# Altium PCB OnePhaseSemLogica_V3.PcbDoc (part 1 of 2)
Units mm, origin at the board's own origin, x right, y up, seen from the top; angles counter-clockwise.
Board outline 104 x 162 mm, 2 copper layers (Top Layer, Bottom Layer); 211 components, 101 nets, 566 pads, 110 vias.
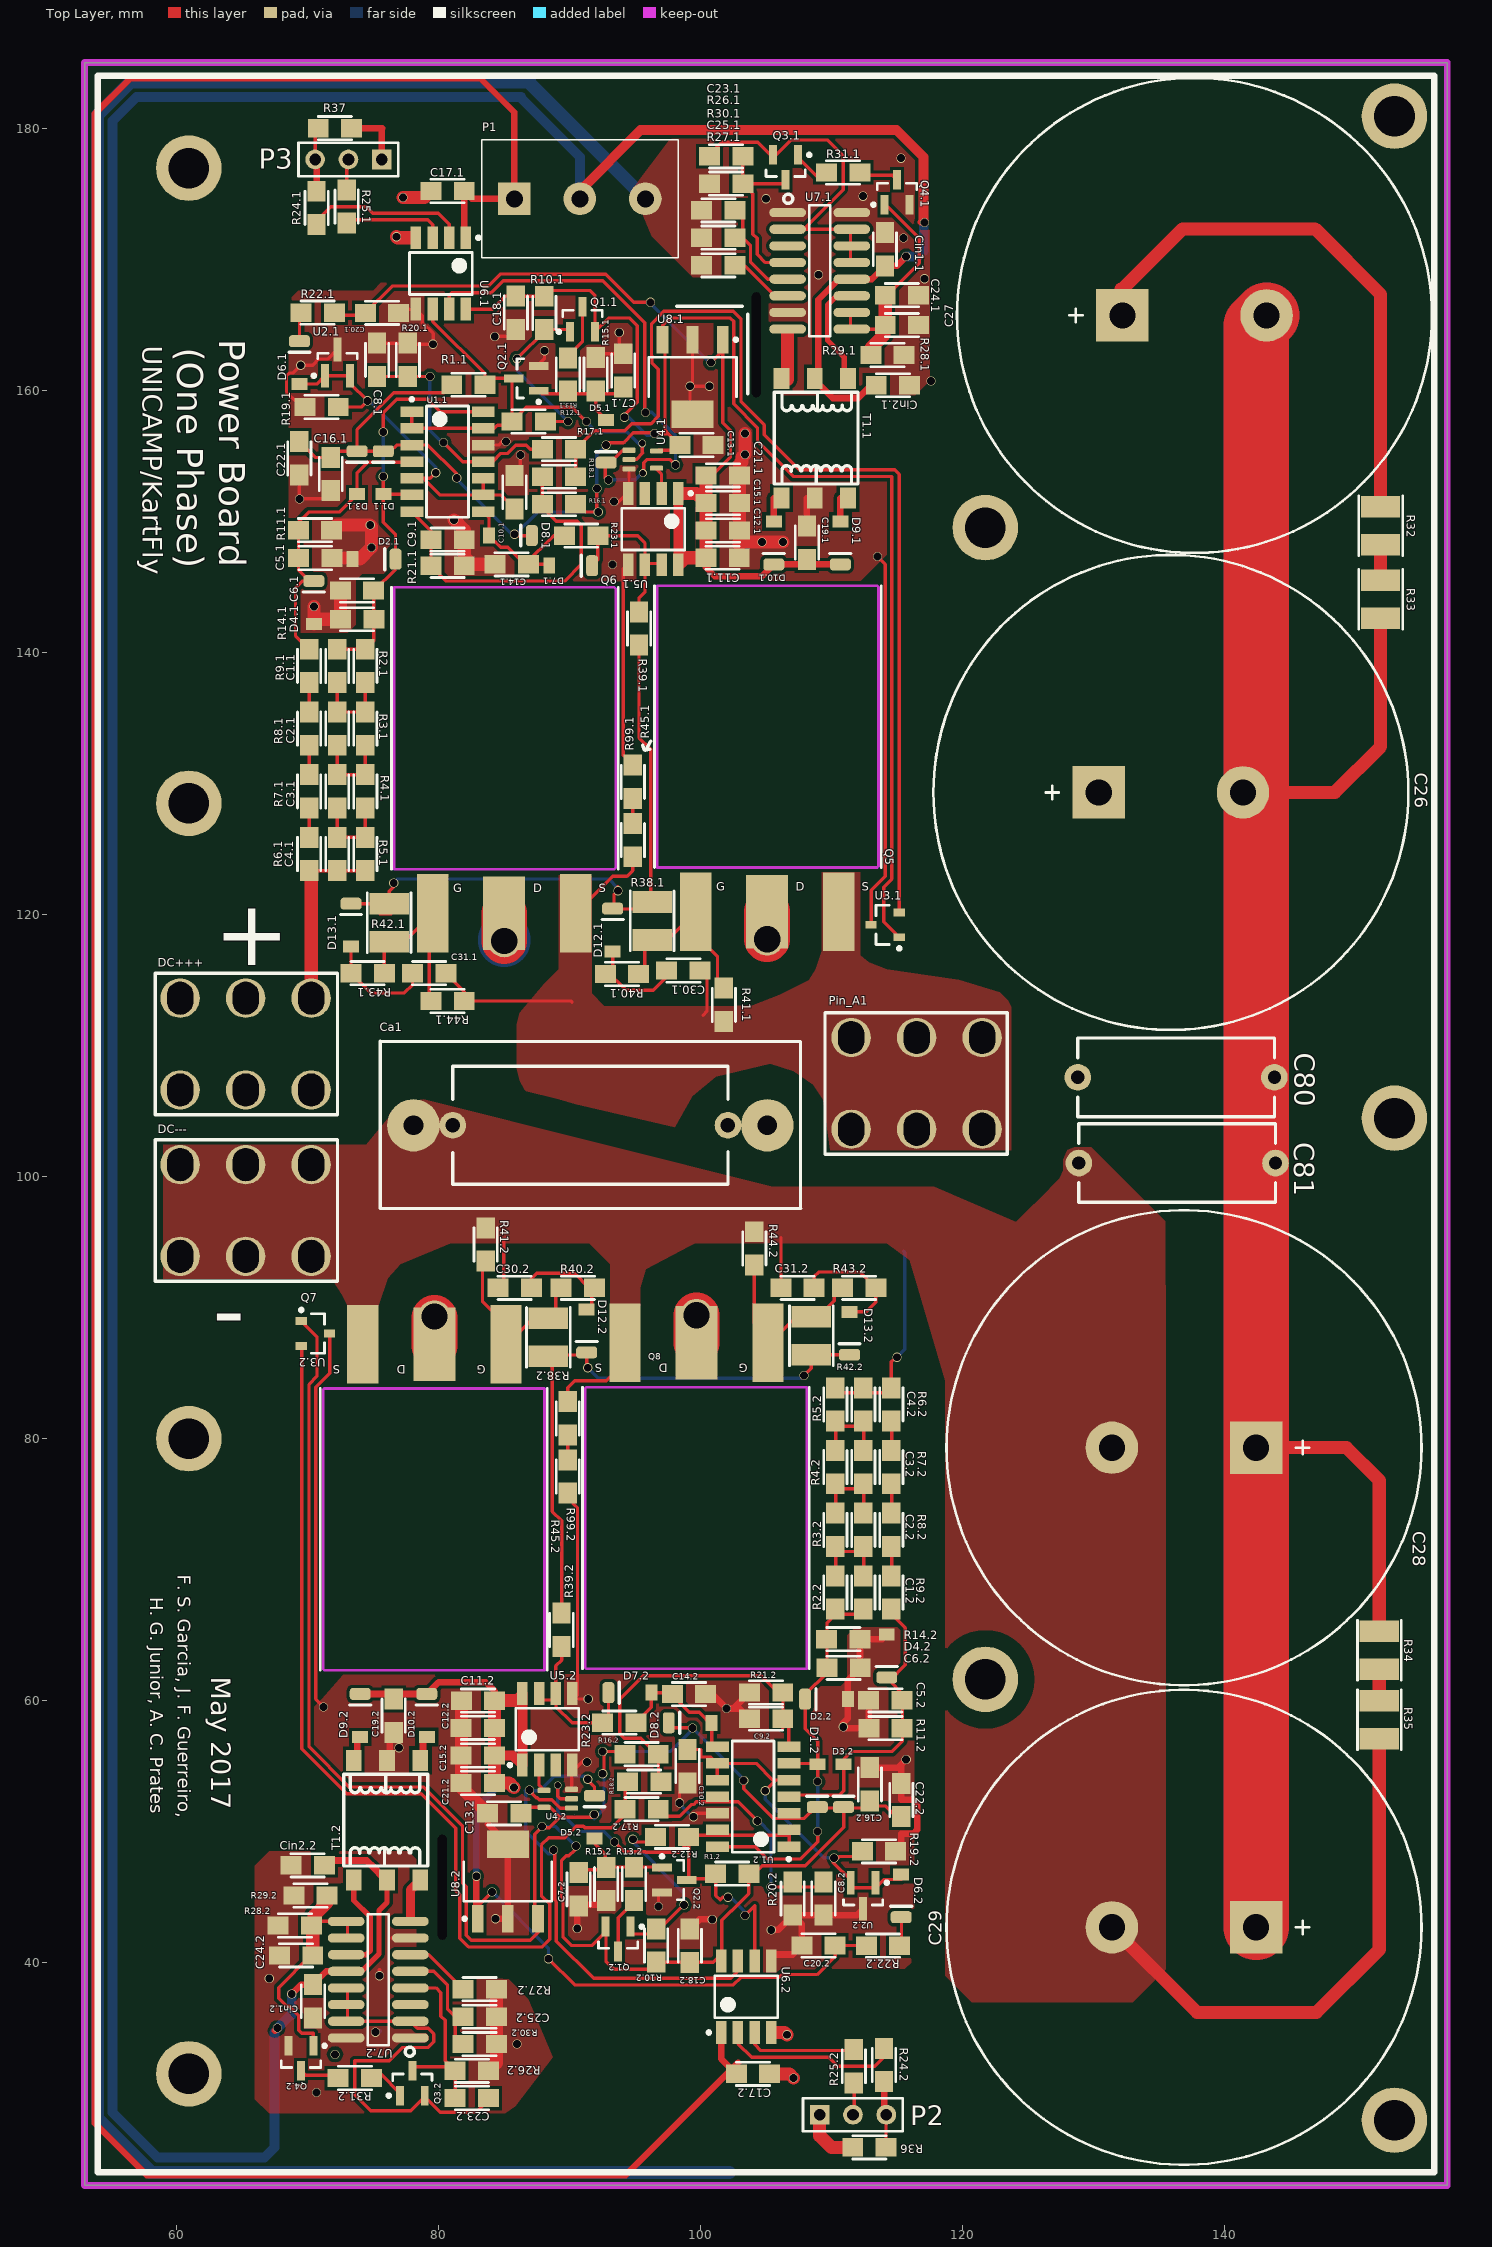
[diagram p0: Top Layer view]
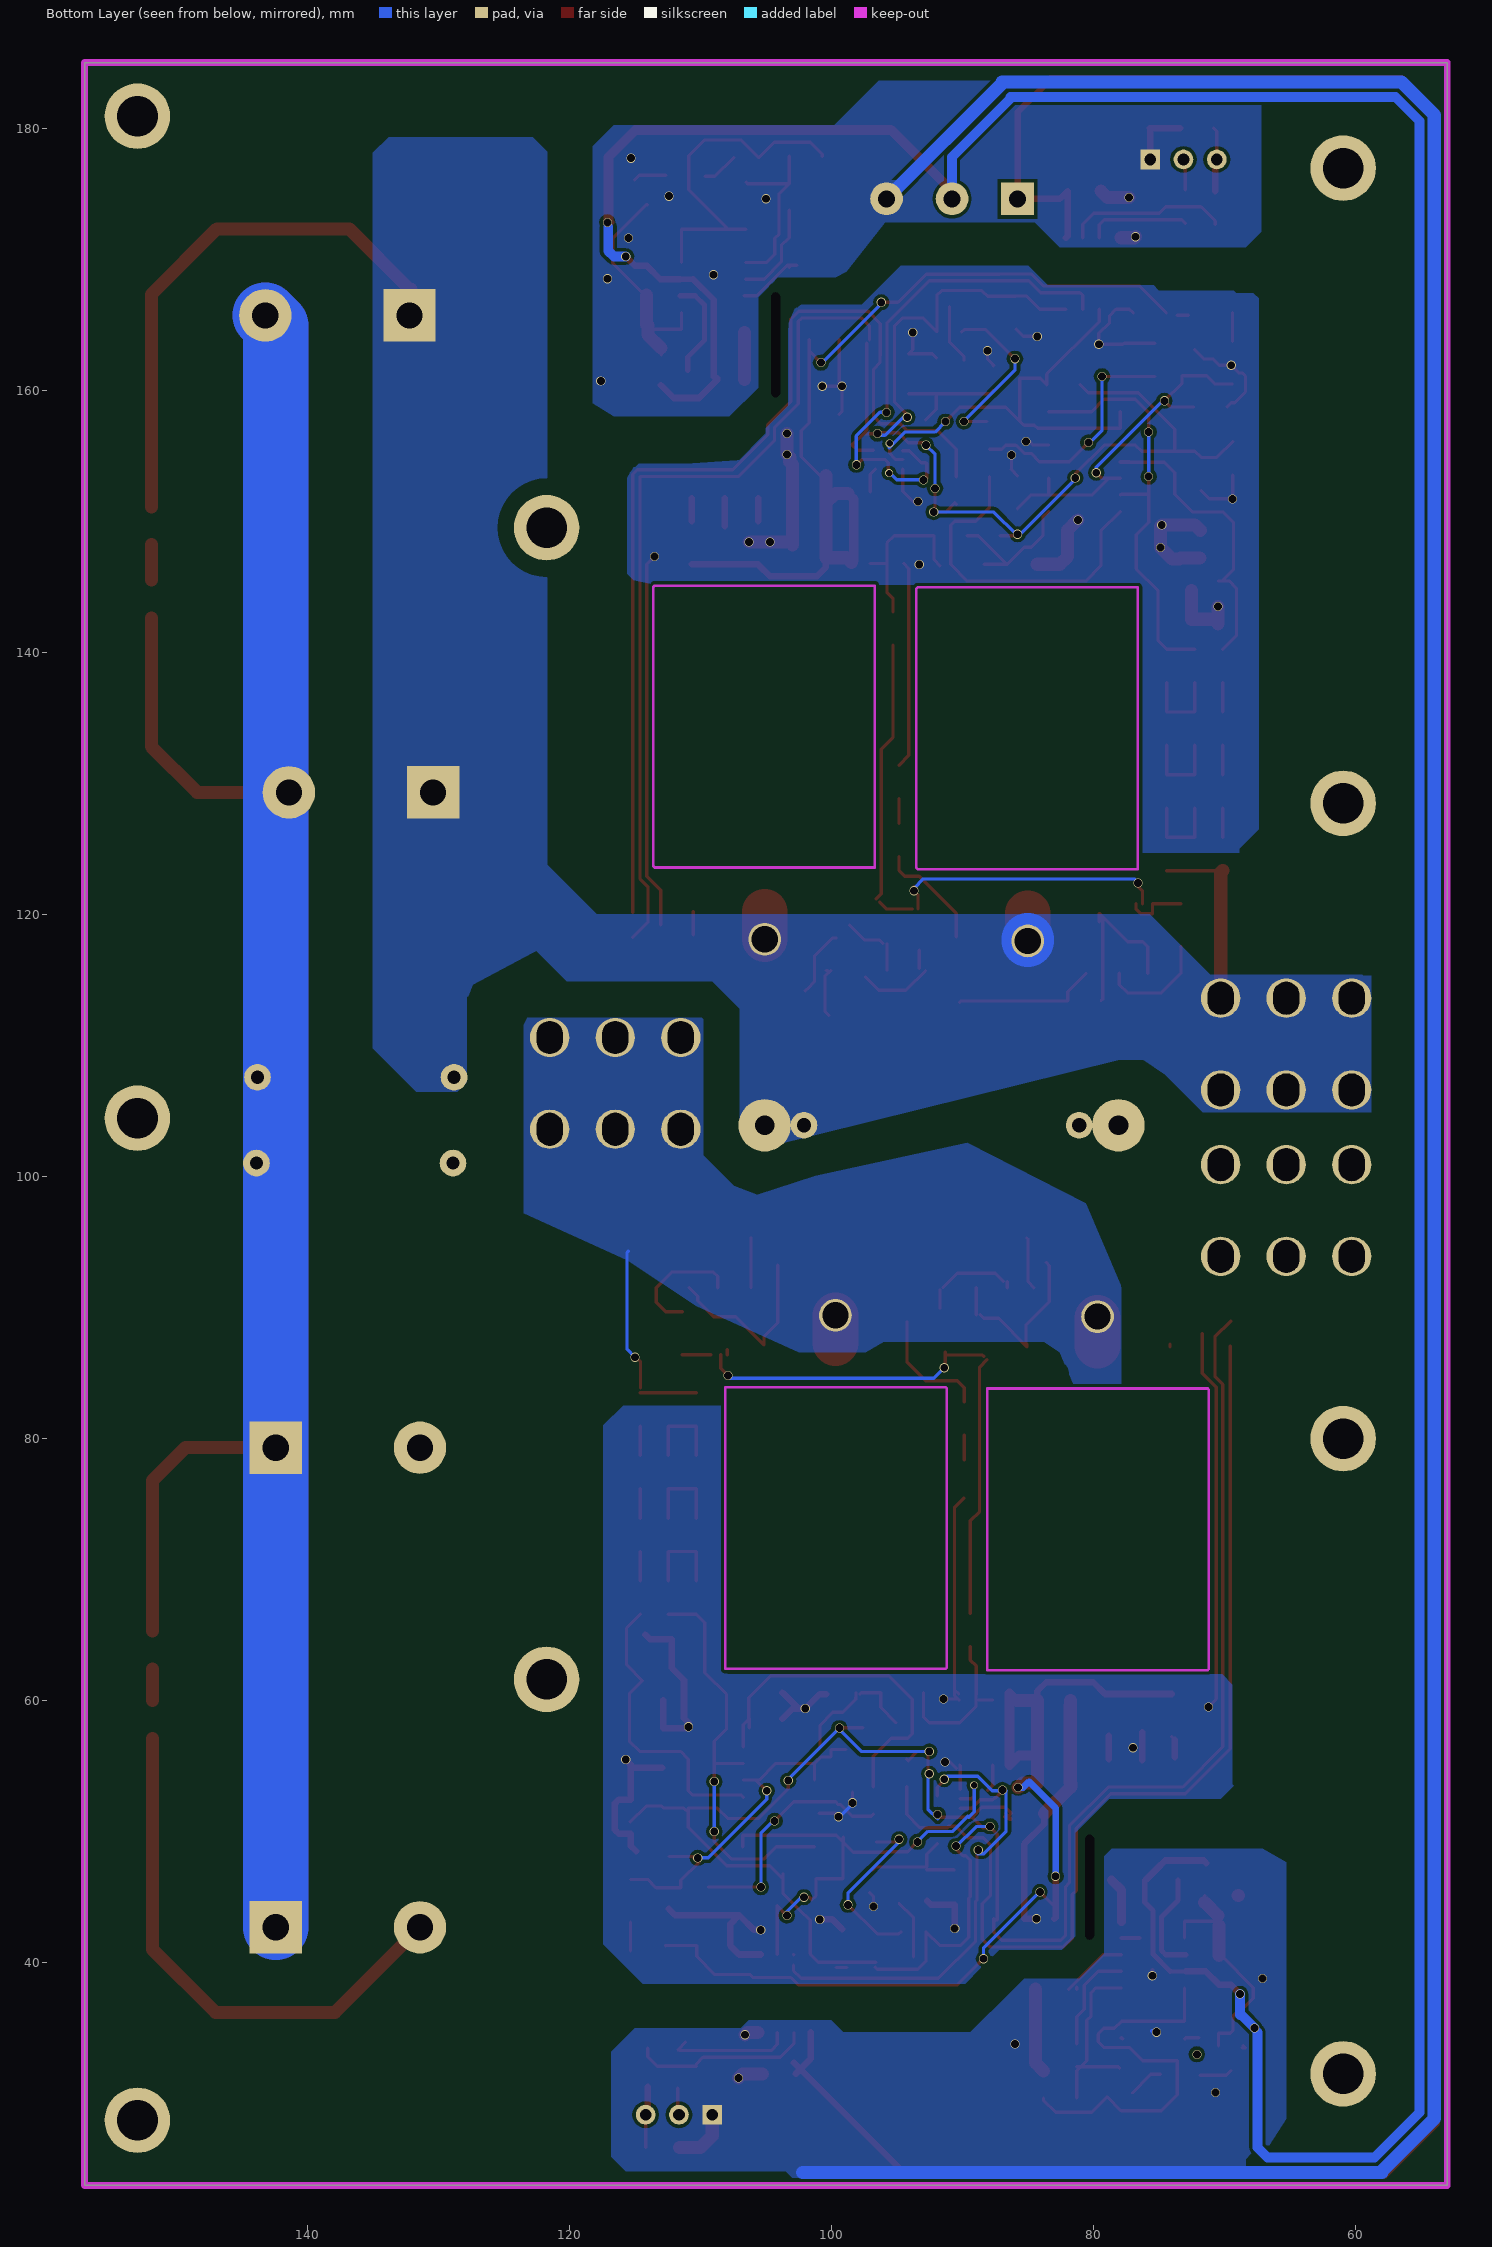
[diagram p1: Bottom Layer view, seen from below]

## Layer stack, top to bottom
Top Solder: solder mask 0.0102, Solder Resist, Dk 3.5
Top Layer: signal copper 0.0356
Dielectric 1: dielectric 0.32, FR-4, Dk 4.8
Bottom Layer: signal copper 0.0356
Bottom Solder: solder mask 0.0102, Solder Resist, Dk 3.5

## Board outline
53,23 157,23 157,185 53,185

## Design rules (kind name [scope] priority, off if disabled: settings)
Clearance [All] p1: gap=0.254
Height [All] p1: minheight=0 maxheight=45 prefheight=12.7
HoleSize [All] p1: absolutevalues=TRUE maxlimit=12 minlimit=0.025 maxpercent=80.000 minpercent=20.000
MinimumSolderMaskSliver [All] p1: minsoldermaskwidth=0.1
PlaneConnect [All] p1: planeconnectstyle=Direct reliefexpansion=0.508 reliefentries=4 reliefconductorwidth=0.254 reliefairgap=0.254
PolygonConnect [All] p1: connectstyle=Direct reliefconductorwidth=0.254 reliefentries=4 polygonreliefangle="90 Angle" airgapwidth=0.254
RoomDefinition U_GateCircuit2 [InComponentClass('U_GateCircuit2')] p1: confinementstyle=ConfineIn formatcopy=TRUE lockcomponents=FALSE outline 61.8,28.1 120.2,28.1 120.2,99.1 61.8,99.1
RoomDefinition U_GateCircuit1 [InComponentClass('U_GateCircuit1')] p2: confinementstyle=ConfineIn formatcopy=TRUE lockcomponents=FALSE outline 61.4,109.2 120,109.2 120,181.9 61.4,181.9
RoomDefinition MainPower [InComponentClass('MainPower')] p3: confinementstyle=ConfineIn formatcopy=TRUE lockcomponents=FALSE outline 52.7,23.5 157,23.5 157,184.3 52.7,184.3
RoomDefinition GD2 [InComponentClass('GD2')] p4: confinementstyle=ConfineIn formatcopy=TRUE lockcomponents=FALSE outline 61.7,26.3 118.5,26.3 118.5,96.4 61.7,96.4
RoomDefinition GD1 [InComponentClass('GD1')] p5: confinementstyle=ConfineIn formatcopy=TRUE lockcomponents=FALSE outline 61.4,110.8 119.1,110.8 119.1,181.8 61.4,181.8
RoomDefinition Supply_Iso1 [InComponentClass('Supply_Iso1')] p6: confinementstyle=ConfineIn formatcopy=TRUE lockcomponents=FALSE outline 61.4,112.2 119.6,112.2 119.6,181.9 61.4,181.9
RoomDefinition Supply_Iso2 [InComponentClass('Supply_Iso2')] p7: confinementstyle=ConfineIn formatcopy=TRUE lockcomponents=FALSE outline 61.8,26.4 118.8,26.4 118.8,96 61.8,96
RoomDefinition OnePhaseMain [InComponentClass('OnePhaseMain')] p8: confinementstyle=ConfineIn formatcopy=TRUE lockcomponents=FALSE outline 67.1,24.5 120.04,24.5 120.04,182.1 67.1,182.1
RoutingVias [All] p1: holewidth=0.7 width=1.1 viastyle="Through Hole" minholewidth=0.5 minwidth=0.6 maxholewidth=1 maxwidth=1.1
SilkToSilkClearance [All] p1: silktosilkclearance=0.01
SilkToSolderMaskClearance [IsPad] p1: minsilkscreentomaskgap=0.03 clearancetoexposedcopper=TRUE
SolderMaskExpansion [All] p1: expansion=0.102
Width [All] p1: maxlimit=50 minlimit=0.254 preferedwidth=0.254 minimp=50.000000 maximp=50.000000 favimp=50.000000
24 further rules are at their usual default settings.

## Classes and differential pairs
component class GD1: C1.1 C2.1 C3.1 C4.1 C5.1 C6.1 C7.1 C8.1 C9.1 C10.1 C11.1 C12.1 C13.1 C14.1 C15.1 C16.1 C17.1 C18.1 D1.1 D2.1 D3.1 D4.1 D5.1 D6.1 D7.1 D8.1 Q1.1 Q2.1 R1.1 R2.1 R3.1 R4.1 R5.1 R6.1 R7.1 R8.1 R9.1 R10.1 R11.1 R12.1 R13.1 R14.1 R15.1 R16.1 R17.1 R18.1 R19.1 R20.1 R21.1 R22.1 R23.1 R24.1 R25.1 U1.1 U2.1 U3.1 U4.1 U5.1 U6.1
component class GD2: C1.2 C2.2 C3.2 C4.2 C5.2 C6.2 C7.2 C8.2 C9.2 C10.2 C11.2 C12.2 C13.2 C14.2 C15.2 C16.2 C17.2 C18.2 D1.2 D2.2 D3.2 D4.2 D5.2 D6.2 D7.2 D8.2 Q1.2 Q2.2 R1.2 R2.2 R3.2 R4.2 R5.2 R6.2 R7.2 R8.2 R9.2 R10.2 R11.2 R12.2 R13.2 R14.2 R15.2 R16.2 R17.2 R18.2 R19.2 R20.2 R21.2 R22.2 R23.2 R24.2 R25.2 U1.2 U2.2 U3.2 U4.2 U5.2 U6.2
component class MainPower: C26 C27 C28 C29 C80 C81 Ca1 DC+++ DC--- Pin_A1 Q5 Q6 Q7 Q8 R32 R33 R34 R35
component class OnePhaseMain: P1 P2 P3 R36 R37
component class Supply_Iso1: C19.1 C20.1 C21.1 C22.1 C23.1 C24.1 C25.1 Cin1.1 Cin2.1 D9.1 D10.1 Q3.1 Q4.1 R26.1 R27.1 R28.1 R29.1 R30.1 R31.1 T1.1 U7.1 U8.1
component class Supply_Iso2: C19.2 C20.2 C21.2 C22.2 C23.2 C24.2 C25.2 Cin1.2 Cin2.2 D9.2 D10.2 Q3.2 Q4.2 R26.2 R27.2 R28.2 R29.2 R30.2 R31.2 T1.2 U7.2 U8.2
component class U_GateCircuit1: C30.1 C31.1 D12.1 D13.1 R38.1 R39.1 R40.1 R41.1 R42.1 R43.1 R44.1 R45.1 R99.1
component class U_GateCircuit2: C30.2 C31.2 D12.2 D13.2 R38.2 R39.2 R40.2 R41.2 R42.2 R43.2 R44.2 R45.2 R99.2
net class CMD[1..2]: CMD1 CMD2
net class D[1..2]: D1 D2
net class G[1..2]: G1 G2
net class S[1..2]: S1 S2
channel class DriverAndProtection: GD1 GD2
channel class GateCircuit: U_GateCircuit1 U_GateCircuit2
channel class GateDriverPowerSupply: Supply_Iso1 Supply_Iso2

## Components (designator, comment, footprint, x,y, rotation, side; value= is the part's Value field where it differs from the comment)
C1.1 "" 0805_W 72.277,138.949 r90 top (schematic designator C1)
C1.2 "" 0805_W 112.44,68.259 r270 top (schematic designator C1)
C2.1 "" 0805_W 72.277,134.166 r90 top (schematic designator C2)
C2.2 "" 0805_W 112.44,73.042 r270 top (schematic designator C2)
C3.1 "" 0805_W 72.277,129.382 r90 top (schematic designator C3)
C3.2 "" 0805_W 112.44,77.826 r270 top (schematic designator C3)
C4.1 "" 0805_W 72.277,124.599 r90 top (schematic designator C4)
C4.2 "" 0805_W 112.44,82.609 r270 top (schematic designator C4)
C5.1 "" 0805_W 70.6,147.2 r0 top (schematic designator C5)
C5.2 "" 0805_W 114.118,60.008 r180 top (schematic designator C5)
C6.1 "" 0805_W 73.8,144.7 r180 top (schematic designator C6)
C6.2 "" 0805_W 110.918,62.508 r0 top (schematic designator C6)
C7.1 "" 0805_W 94.1,161.5 r90 top (schematic designator C7)
C7.2 "" 0805_W 90.718,45.608 r270 top (schematic designator C7)
C8.1 "" 0805_W 75.316,162.307 r90 top (schematic designator C8)
C8.2 "" 0805_W 109.402,44.901 r270 top (schematic designator C8)
C9.1 "" 0805_W 80.7,148.6 r0 top (schematic designator C9)
C9.2 "" 0805_W 105.018,58.608 r180 top (schematic designator C9)
C10.1 "" 0805_W 85.8,152.2 r90 top (schematic designator C10)
C10.2 "" 0805_W 99.018,55.008 r270 top (schematic designator C10)
C11.1 "" 0805_W 101.7,147.2 r180 top (schematic designator C11)
C11.2 "" 0805_W 83.018,60.008 r0 top (schematic designator C11)
C12.1 "" 0805_W 101.7,149.3 r0 top (schematic designator C12)
C12.2 "" 0805_W 83.018,57.908 r180 top (schematic designator C12)
C13.1 "" 0805_W 99.7,155.8 r180 top (schematic designator C13)
C13.2 "" 0805_W 85.018,51.408 r0 top (schematic designator C13)
C14.1 "" 0805_W 85.6,146.7 r180 top (schematic designator C14)
C14.2 "" 0805_W 99.118,60.508 r0 top (schematic designator C14)
C15.1 "" 0805_W 101.7,151.4 r0 top (schematic designator C15)
C15.2 "" 0805_W 83.018,55.808 r180 top (schematic designator C15)
C16.1 "" 0805_W 71.8,153.6 r270 top (schematic designator C16)
C16.2 "" 0805_W 112.918,53.608 r90 top (schematic designator C16)
C17.1 "" 0805_W 80.7,175.2 r0 top (schematic designator C17)
C17.2 "" 0805_W 104.018,31.508 r180 top (schematic designator C17)
C18.1 "" 0805_W 85.9,165.9 r90 top (schematic designator C18)
C18.2 "" 0805_W 99.2,41.3 r270 top (schematic designator C18)
C19.1 "" 0805_W 108.119,148.351 r90 top (schematic designator C19)
C19.2 "" 0805_W 76.598,58.857 r270 top (schematic designator C19)
C20.1 "" 0805_W 75.7,165.9 r0 top (schematic designator C20)
C20.2 "" 0805_W 109.018,41.308 r180 top (schematic designator C20)
C21.1 "" 0805_W 101.7,153.5 r0 top (schematic designator C21)
C21.2 "" 0805_W 83.018,53.708 r180 top (schematic designator C21)
C22.1 "" 0805_W 69.4,154.8 r270 top (schematic designator C22)
C22.2 "" 0805_W 115.318,52.408 r90 top (schematic designator C22)
C23.1 "" 0805_W 101.956,177.845 r0 top (schematic designator C23)
C23.2 "" 0805_W 82.562,29.663 r180 top (schematic designator C23)
C24.1 "" 0805_W 115.379,167.241 r180 top (schematic designator C24)
C24.2 "" 0805_W 69.139,40.567 r0 top (schematic designator C24)
C25.1 "" 0805_W 101.369,171.621 r180 top (schematic designator C25)
C25.2 "" 0805_W 83.148,35.887 r0 top (schematic designator C25)
C26 "Cap2" "Capacitor Eletrolitico - duplicate" 130.4,129.3 r0 top
C27 "Cap2" "Capacitor Eletrolitico - duplicate" 132.2,165.7 r0 top
C28 "Cap2" "Capacitor Eletrolitico - duplicate" 142.4,79.3 r180 top
C29 "Cap2" "Capacitor Eletrolitico - duplicate" 142.4,42.7 r180 top
C30.1 "" 0805_W 98.7,115.7 r180 top (schematic designator C30)
C30.2 "" 0805_W 85.818,91.508 r0 top (schematic designator C30)
C31.1 "" 0805_W 79.311,115.497 r180 top (schematic designator C31)
C31.2 "" 0805_W 107.407,91.511 r0 top (schematic designator C31)
C80 "Cap" CAPACITOR_POL_15X6MM 143.8,107.56 r180 top
C81 "Cap" CAPACITOR_POL_15X6MM 128.88,101.02 r0 top
Ca1 "Polyester" CAPACITOR_POL_2SIZES 105.1,103.9 r180 top
Cin1.1 "" 0805_W 114.069,170.742 r90 top (schematic designator Cin1)
Cin1.2 "" 0805_W 70.449,37.066 r270 top (schematic designator Cin1)
Cin2.1 "" 0805_W 114.679,160.383 r0 top (schematic designator Cin2)
Cin2.2 "" 0805_W 70.039,47.425 r180 top (schematic designator Cin2)
D1.1 "" SOD-123 75.8,153.7 r90 top (schematic designator D1)
D1.2 "" SOD-123 108.918,53.508 r270 top (schematic designator D1)
D2.1 "" SOD-123 75.1,147.1 r0 top (schematic designator D2)
D2.2 "" SOD-123 109.618,60.108 r180 top (schematic designator D2)
D3.1 "" SOD-123 73.8,153.7 r90 top (schematic designator D3)
D3.2 "" SOD-123 110.918,53.508 r270 top (schematic designator D3)
D4.1 "" SOD-123 70.5,143.8 r90 top (schematic designator D4)
D4.2 "" SOD-123 114.218,63.408 r270 top (schematic designator D4)
D5.1 "" SOD-123 92.8,156.1 r270 top (schematic designator D5)
D5.2 "" SOD-123 91.918,51.108 r90 top (schematic designator D5)
D6.1 "" SOD-123 69.4,162.1 r90 top (schematic designator D6)
D6.2 "" SOD-123 115.318,45.108 r270 top (schematic designator D6)
D7.1 "" SOD-123 90.1,146.6 r0 top (schematic designator D7)
D7.2 "" SOD-123 94.618,60.608 r180 top (schematic designator D7)
D8.1 "" SOD-123 85.5,148.9 r0 top (schematic designator D8)
D8.2 "" SOD-123 99.218,58.308 r180 top (schematic designator D8)
D9.1 "" SOD-123 110.679,148.337 r270 top (schematic designator D9)
D9.2 "" SOD-123 74.039,58.87 r90 top (schematic designator D9)
D10.1 "" SOD-123 105.599,148.337 r270 top (schematic designator D10)
D10.2 "" SOD-123 79.119,58.87 r90 top (schematic designator D10)
D12.1 "" SOD-123 93.3,118.8 r90 top (schematic designator D12)
D12.2 "" SOD-123 91.318,88.208 r270 top (schematic designator D12)
D13.1 "" SOD-123 73.342,119.18 r90 top (schematic designator D13)
D13.2 "" SOD-123 111.376,88.028 r270 top (schematic designator D13)
DC+++ "Socket" "POWER CONECTOR" 60.3,106.6 r0 top
DC--- "Socket" "POWER CONECTOR" 60.3,93.9 r0 top
P1 "Header 3" "3 PIN  BORNER" 90.8,174.6 r0 top
P2 "Header 3" HDR1X3 109.1,28.4 r0 top
P3 "Header 3" HDR1X3 75.68,177.6 r180 top
Pin_A1 "Socket" "POWER CONECTOR" 121.5,110.6 r180 top
Q1.1 "" SOT-23-TT3_N 91,165.4 r90 top (schematic designator Q1)
Q1.2 "" SOT-23-TT3_N 93.718,41.808 r270 top (schematic designator Q1)
Q2.1 "" SOT-23-TT3_N 86.7,160.9 r180 top (schematic designator Q2)
Q2.2 "" SOT-23-TT3_N 98.018,46.308 r0 top (schematic designator Q2)
Q3.1 "" SOT-23-TT3_N 106.5,177 r270 top (schematic designator Q3)
Q3.2 "" SOT-23-TT3_N 78.018,30.808 r90 top (schematic designator Q3)
Q4.1 "" SOT-23-TT3_N 115,175.1 r90 top (schematic designator Q4)
Q4.2 "" SOT-23-TT3_N 69.518,32.708 r270 top (schematic designator Q4)
Q5 "IRFP260" TO227 105.092,120.196 r0 top
Q6 "IRFP260" TO227 85.026,120.069 r0 top
Q7 "IRFP260" TO227 79.7,87.2 r180 top
Q8 "IRFP260" TO227 99.7,87.3 r180 top
R1.1 "" 0805_W 82.3,160.4 r180 top (schematic designator R1)
R1.2 "" 0805_W 102.418,46.808 r0 top (schematic designator R1)
R2.1 "" 0805_W 74.437,138.963 r270 top (schematic designator R2)
R2.2 "" 0805_W 110.281,68.245 r90 top (schematic designator R2)
R3.1 "" 0805_W 74.418,134.166 r90 top (schematic designator R3)
R3.2 "" 0805_W 110.299,73.042 r270 top (schematic designator R3)
R4.1 "" 0805_W 74.418,129.382 r90 top (schematic designator R4)
R4.2 "" 0805_W 110.299,77.826 r270 top (schematic designator R4)
R5.1 "" 0805_W 74.437,124.612 r270 top (schematic designator R5)
R5.2 "" 0805_W 110.281,82.596 r90 top (schematic designator R5)
R6.1 "" 0805_W 70.155,124.612 r270 top (schematic designator R6)
R6.2 "" 0805_W 114.563,82.596 r90 top (schematic designator R6)
R7.1 "" 0805_W 70.155,129.396 r270 top (schematic designator R7)
R7.2 "" 0805_W 114.563,77.812 r90 top (schematic designator R7)
R8.1 "" 0805_W 70.155,134.179 r270 top (schematic designator R8)
R8.2 "" 0805_W 114.563,73.029 r90 top (schematic designator R8)
R9.1 "" 0805_W 70.155,138.963 r270 top (schematic designator R9)
R9.2 "" 0805_W 114.563,68.245 r90 top (schematic designator R9)
R10.1 "" 0805_W 88.1,165.9 r270 top (schematic designator R10)
R10.2 "" 0805_W 96.618,41.308 r90 top (schematic designator R10)
R11.1 "" 0805_W 70.6,149.3 r180 top (schematic designator R11)
R11.2 "" 0805_W 114.118,57.908 r0 top (schematic designator R11)
R12.1 "" 0805_W 86.9,157.6 r180 top (schematic designator R12)
R12.2 "" 0805_W 97.818,49.608 r0 top (schematic designator R12)
R13.1 "" 0805_W 89.9,161.2 r270 top (schematic designator R13)
R13.2 "" 0805_W 94.918,46.008 r90 top (schematic designator R13)
R14.1 "" 0805_W 73.803,142.524 r0 top (schematic designator R14)
R14.2 "" 0805_W 110.914,64.683 r180 top (schematic designator R14)
R15.1 "" 0805_W 92,161.2 r90 top (schematic designator R15)
R15.2 "" 0805_W 92.818,46.008 r270 top (schematic designator R15)
R16.1 "" 0805_W 89.2,151.3 r0 top (schematic designator R16)
R16.2 "" 0805_W 95.518,55.908 r180 top (schematic designator R16)
R17.1 "" 0805_W 89.2,155.5 r0 top (schematic designator R17)
R17.2 "" 0805_W 95.518,51.708 r180 top (schematic designator R17)
R18.1 "" 0805_W 89.2,153.4 r0 top (schematic designator R18)
R18.2 "" 0805_W 95.718,53.808 r180 top (schematic designator R18)
R19.1 "" 0805_W 71.1,158.7 r180 top (schematic designator R19)
R19.2 "" 0805_W 113.618,48.508 r0 top (schematic designator R19)
R20.1 "" 0805_W 77.666,162.307 r90 top (schematic designator R20)
R20.2 "" 0805_W 107.052,44.901 r270 top (schematic designator R20)
R21.1 "" 0805_W 80.7,146.6 r0 top (schematic designator R21)
R21.2 "" 0805_W 105.018,60.608 r180 top (schematic designator R21)
R22.1 "" 0805_W 70.8,165.9 r180 top (schematic designator R22)
R22.2 "" 0805_W 113.918,41.308 r0 top (schematic designator R22)
R23.1 "" 0805_W 90.9,148.9 r0 top (schematic designator R23)
R23.2 "" 0805_W 93.818,58.308 r180 top (schematic designator R23)
R24.1 "" 0805_W 70.7,173.9 r90 top (schematic designator R24)
R24.2 "" 0805_W 114.018,32.208 r270 top (schematic designator R24)
R25.1 "" 0805_W 73,174 r90 top (schematic designator R25)
R25.2 "" 0805_W 111.718,32.108 r270 top (schematic designator R25)
R26.1 "" 0805_W 101.956,175.768 r0 top (schematic designator R26)
R26.2 "" 0805_W 82.562,31.739 r180 top (schematic designator R26)
R27.1 "" 0805_W 101.358,169.532 r0 top (schematic designator R27)
R27.2 "" 0805_W 83.16,37.976 r180 top (schematic designator R27)
R28.1 "" 0805_W 115.379,164.955 r180 top (schematic designator R28)
R28.2 "" 0805_W 69.039,42.853 r0 top (schematic designator R28)
R29.1 "" 0805_W 114.279,162.669 r180 top (schematic designator R29)
R29.2 "" 0805_W 70.239,45.139 r0 top (schematic designator R29)
R30.1 "" 0805_W 101.356,173.725 r0 top (schematic designator R30)
R30.2 "" 0805_W 83.162,33.782 r180 top (schematic designator R30)
R31.1 "" 0805_W 110.9,176.6 r180 top (schematic designator R31)
R31.2 "" 0805_W 73.618,31.208 r0 top (schematic designator R31)
R32 "Res_1210" 1210_W 151.9,151.1 r270 top
R33 "Res_1210" 1210_W 151.9,145.5 r270 top
R34 "Res_1210" 1210_W 151.8,65.3 r270 top
R35 "Res_1210" 1210_W 151.8,60 r270 top
R36 "Res_1210" 0805_W 112.9,25.9 r180 top
R37 "Res_1210" 0805_W 72.1,180 r0 top
R38.1 "" 1210_W 96.329,118.037 r90 top (schematic designator R38)
R38.2 "" 1210_W 88.389,89.171 r270 top (schematic designator R38)
R39.1 "" 0805_W 95.309,141.8 r90 top (schematic designator R39)
R39.2 "" 0805_W 89.408,65.408 r270 top (schematic designator R39)
R40.1 "" 0805_W 94.02,115.44 r180 top (schematic designator R40)
R40.2 "" 0805_W 90.638,91.508 r0 top (schematic designator R40)
R41.1 "" 0805_W 101.8,113.1 r270 top (schematic designator R41)
R41.2 "" 0805_W 83.6,94.8 r90 top (schematic designator R41)
R42.1 "" 1210_W 76.263,117.91 r90 top (schematic designator R42)
R42.2 "" 1210_W 108.455,89.298 r270 top (schematic designator R42)
R43.1 "" 0805_W 74.612,115.497 r180 top (schematic designator R43)
R43.2 "" 0805_W 112.106,91.511 r0 top (schematic designator R43)
R44.1 "" 0805_W 80.7,113.4 r0 top (schematic designator R44)
R44.2 "" 0805_W 104.1,94.5 r90 top (schematic designator R44)
R45.1 "" 0805_W 94.832,125.657 r90 top (schematic designator R45)
R45.2 "" 0805_W 89.886,81.551 r270 top (schematic designator R45)
R99.1 "" 0805_W 94.832,130.102 r90 top (schematic designator R99)
R99.2 "" 0805_W 89.886,77.106 r270 top (schematic designator R99)
T1.1 "" TRAFO 108.729,156.332 r270 top (schematic designator T1)
T1.2 "" TRAFO 76.089,50.876 r90 top (schematic designator T1)
U1.1 "" SOIC-14N 91.6,139.3 r0 top (schematic designator U1)
U1.2 "" SOIC-14N 93.118,67.908 r180 top (schematic designator U1)
U2.1 "" SOT-23-TT3_M 72.3,162.1 r90 top (schematic designator U2)
U2.2 "" SOT-23-TT3_M 112.418,45.108 r270 top (schematic designator U2)
U3.1 "" SOT-23_L 114.1,119.2 r180 top (schematic designator U3)
U3.2 "" SOT-23_L 70.618,88.008 r0 top (schematic designator U3)
U4.1 "" SOT353 95.6,154.7 r0 top (schematic designator U4)
U4.2 "" SOT353 89.118,52.508 r180 top (schematic designator U4)
U5.1 "" SOIC-8N 96.4,149.4 r270 top (schematic designator U5)
U5.2 "" SOIC-8N 88.318,57.808 r90 top (schematic designator U5)
U6.1 "" SOIC-8N 80.2,168.9 r270 top (schematic designator U6)
U6.2 "" SOIC-8N 103.5,37.4 r90 top (schematic designator U6)
U7.1 "" SOIC16_M 109.1,169.1 r0 top (schematic designator U7)
U7.2 "" SOIC16_M 75.418,38.708 r180 top (schematic designator U7)
U8.1 "" SOT223 99.4,161 r270 top (schematic designator U8)
U8.2 "" SOT223 85.3,46.2 r90 top (schematic designator U8)

## Footprints (in the part's own frame and the unit in brackets; to place one, negate y for a bottom-side part, rotate by r counter-clockwise, add the part's x,y. Pads: shape width x height; smd on the part's side, far side on the other; paste and mask are expansions set on the pad)
"3 PIN  BORNER" [mm]
  rect 2.5x2.5 hole 1.3 mask+0.05: 1(-5,0)
  round 2.5 hole 1.3 mask+0.05: 2(0,0) 3(5,0)
  silkscreen extent -7.5,-4.5 7.5,4.5
0805_W [mm]
  rect 1.6x1.397 smd: 1(-1.263,-0.009) 2(1.277,-0.009)
  silkscreen extent -1.26,-0.9 1.28,0.88
1210_W [mm]
  rect 1.65x3 smd: 1(0,0) 2(2.9,0)
  silkscreen extent -0.83,-1.66 3.74,1.68
"Capacitor Eletrolitico - duplicate" [mm]
  rect 4x4 hole 2: 1(0,0)
  round 4 hole 2: 2(11,0)
  silkscreen extent -12.62,-18.12 23.62,18.12, body extent -12.62,-18.12 23.62,18.12, height 40
CAPACITOR_POL_2SIZES [mm]
  round 4 hole 1.5: 1(0,0) 2(27,0)
  round 2.032 hole 1.1: 1(3,0) 2(24,0)
  silkscreen extent -2.57,-6.43 29.54,6.35, body extent 2.87,-4.63 24.13,4.63, height 14
CAPACITOR_POL_15X6MM [mil]
  round 80 hole 40: 1(0,0) 2(590.55,0)
  silkscreen extent 0,-118 591,118, body extent 0,-118 591,118, height 335
HDR1X3 [mm] "Connector; Header; 3 Position"
  rect 1.5x1.5 hole 0.9: 1(0,0)
  round 1.5 hole 0.9: 2(2.54,0) 3(5.08,0)
  silkscreen extent -1.27,-1.27 6.35,1.27
"POWER CONECTOR" [mm] "Screw M4 and 30A"
  round 3 hole 2 slot 2.5 at 90 deg: 1(0,0) 1(0,7) 1(5,0) 1(5,7) 1(10,0) 1(10,7)
  silkscreen extent -1.9,-1.9 12,8.9
SOD-123 [mm] "Diodo"
  rect 0.91x1.22 smd: 1(-1.635,0)
  rrect50% 0.91x1.6 smd: 2(1.635,0)
  silkscreen extent 0.8,-0.8 0.8,0.8
SOIC16_M [mm] "SOIC, 16-Leads, Body 9.9x3.9mm, Pitch 1.27mm, IPC Low Density"
  oval 2.8x0.7 smd: 1(-2.45,4.445) 2(-2.45,3.175) 3(-2.45,1.905) 4(-2.45,0.635) 5(-2.45,-0.635) 6(-2.45,-1.905) 7(-2.45,-3.175) 8(-2.45,-4.445) 9(2.45,-4.445) 10(2.45,-3.175) 11(2.45,-1.905) 12(2.45,-0.635) 13(2.45,0.635) 14(2.45,1.905) 15(2.45,3.175) 16(2.45,4.445)
  silkscreen extent -2.75,-5 0.8,5.85, body extent -2,-5 2,5, height 1.91
SOIC-8N [mm] "SOIC, 8-Leads, Body 4,89x3,90mm, Pitch 1,27mm, IPC Medium Density"
  rect 1.75x0.8 smd: 1(-2.725,1.905) 2(-2.725,0.635) 3(-2.725,-0.635) 4(-2.725,-1.905) 5(2.725,-1.905) 6(2.725,-0.635) 7(2.725,0.635) 8(2.725,1.905)
  silkscreen extent -2.85,-2.4 1.6,2.98, body extent -2,-2.4 2,2.4, height 3.18
SOIC-14N [mm] "SOIC, 14-Leads, Body 8,61x3,90mm, Pitch 1,27mm, IPC Medium Density"
  rect 1.75x0.8 smd: 1(-13.625,19.05) 2(-13.625,17.78) 3(-13.625,16.51) 4(-13.625,15.24) 5(-13.625,13.97) 6(-13.625,12.7) 7(-13.625,11.43) 8(-8.175,11.43) 9(-8.175,12.7) 10(-8.175,13.97) 11(-8.175,15.24) 12(-8.175,16.51) 13(-8.175,17.78) 14(-8.175,19.05)
  silkscreen extent -13.75,10.99 -9.3,20.12, body extent -12.9,10.99 -8.9,19.49, height 1.75
SOT223 [mm] "large"
  rect 2.1x0.9 smd: 1(-2.85,0) 2(-2.85,-2.3) 3(-2.85,2.3)
  rect 2.1x3.2 smd: 1(2.85,0)
  silkscreen extent -2.97,-3.35 1.5,3.43, body extent -1.85,-3.35 1.85,3.35, height 1.7
SOT353 [mm]
  round 0.5 on Mech15: 0(0,0)
  rrect50% 1x0.4 smd mask+0: 1(-1.05,0.71) 2(-1.05,0) 3(-1.05,-0.72) 4(1.05,-0.65) 5(1.05,0.65)
  body extent -1.2,-1.1 1.2,1.1, height 1.1
SOT-23-TT3_M [mm] "SOT23, 3-Leads, Body 2.9x1.3mm, Pitch 0.95mm, Lead Span 2.4mm, IPC Low Density"
  rect 1.8x0.6 smd: 1(-1,0.95) 2(-1,-0.95) 3(1,0)
  silkscreen extent -1.12,-1.5 0.7,1.92, body extent -0.7,-1.5 0.7,1.5, height 1.12
SOT-23-TT3_N [mm] "SOT23, 3-Leads, Body 2.9x1.3mm, Pitch 0.95mm, Lead Span 2.4mm, IPC Medium Density"
  rect 1.5x0.6 smd: 1(-0.95,0.95) 2(-0.95,-0.95) 3(0.95,0)
  silkscreen extent -1.07,-1.5 0.7,1.92, body extent -0.7,-1.5 0.7,1.5, height 1.12
SOT-23_L [mm] "SOT23, 3-Leads, Body 2.9x1.3mm, Pitch 0.95mm, Lead Span 2.5mm, IPC High Density"
  rect 0.85x0.6 smd: 1(-1.075,0.95) 2(-1.075,-0.95) 3(1.075,0)
  silkscreen extent -1.2,-1.5 0.7,1.92, body extent -0.7,-1.5 0.7,1.5, height 1.1
TO227 [mm]
  rect 2.39x6 smd: 1(-5.46,0) 3(5.46,0)
  round 2.5 hole 2: 2(0,-2.1)
  rect 3.2x5.6 smd: 2(0,0)
  Keep-Out Layer lines w0.2: -8.4,3.38 -8.4,24.88 8.4,24.88 8.5,24.78 8.5,3.48 8.4,3.38 -8.4,3.38
  silkscreen extent -8.6,3.38 8.7,24.88, body extent -8.5,3.38 8.5,24.88, height 2.5
TRAFO [mm] "transformador smd TI"
  rect 1.6x1.2 smd: 1(-4.57,2.54) 2(-4.57,0) 3(-4.57,-2.54) 4(4.57,-2.54) 5(4.57,0) 6(4.57,2.54)
  silkscreen extent -3.5,-3.1 3.5,3.3

## Part data
C1.1 C1.2 C2.1 C2.2 C3.1 C3.2 C4.1 C4.2 C5.1 C5.2 C6.1 C6.2 C7.1 C7.2 C8.1 C8.2 C9.1 C9.2 C10.1 C10.2 C11.1 C11.2 C14.1 C14.2 C16.1 C16.2 C17.1 C17.2 C18.1 C18.2 C23.1 C23.2 C24.1 C24.2 C25.1 C25.2 C30.1 C30.2 C31.1 C31.2 Cin1.1 Cin1.2 Cin2.1 Cin2.2: library part Cap_0805, "Capacitor"
C12.1 C12.2 C13.1 C13.2 C15.1 C15.2 C19.1 C19.2 C20.1 C20.2 C21.1 C21.2 C22.1 C22.2: library part Capacitor_nao_polarizado, "Capacitor nao polarizado"
C26 C27 C28 C29 C80 C81: "Capacitor"
Ca1: library part GRM21BC81E475KA12L, "GRM21BC81E475KA1"
D1.1 D1.2 D2.1 D2.2 D3.1 D3.2 D4.1 D4.2 D7.1 D7.2 D8.1 D8.2 D9.1 D9.2 D10.1 D10.2: library part "D Schottky", "Schottky Diode"
D5.1 D5.2 D12.1 D12.2 D13.1 D13.2: library part Schottky, "Diodo Schottky"
D6.1 D6.2: library part "D Zener", "Zener Diode"
P1 P2 P3: "Header, 3-Pin"
Q1.1 Q1.2 Q3.1 Q3.2: library part BC857, "PNP General-purpose Transistor"
Q2.1 Q2.2 Q4.1 Q4.2: library part BC847, "NPN General-purpose Transistor"
Q5 Q6 Q7 Q8: "HEXFET Power MOSFET"
R1.1 R1.2 R2.1 R2.2 R3.1 R3.2 R4.1 R4.2 R5.1 R5.2 R6.1 R6.2 R7.1 R7.2 R8.1 R8.2 R9.1 R9.2 R11.1 R11.2 R12.1 R12.2 R13.1 R13.2 R14.1 R14.2 R16.1 R16.2 R17.1 R17.2 R18.1 R18.2 R20.1 R20.2 R21.1 R21.2 R23.1 R23.2 R24.1 R24.2 R25.1 R25.2 R26.1 R26.2 R27.1 R27.2 R28.1 R28.2 R29.1 R29.2 R30.1 R30.2 R31.1 R31.2 R32 R33 R34 R35 R36 R37 R38.1 R38.2 R39.1 R39.2 R40.1 R40.2 R41.1 R41.2 R42.1 R42.2 R43.1 R43.2 R44.1 R44.2 R45.1 R45.2 R99.1 R99.2: library part Res_0805, "Resistor"
R10.1 R10.2 R15.1 R15.2 R19.1 R19.2 R22.1 R22.2: library part Res_0805, "Resistor- Not Used"
T1.1 T1.2: library part Trafo-TI
U1.1 U1.2: library part LM339AD, "Low-Power Quad Voltage Comparator"
U2.1 U2.2: library part TL431ACLP
U3.1 U3.2: library part MCP9700T-E/TT, "Low-Power Linear Active Thermistor IC, 3-Pin SOT-23, Extended Temperature, Tape and Reel"
U4.1 U4.2: library part AND
U5.1 U5.2: library part TC4420COA, "6A High-Speed MOSFET Driver, Non-Inverting, Commercial Temperature"
U6.1 U6.2: library part Si8421, "Two Channel, High Speed Digital Isolators"
U7.1 U7.2: library part TL494ID, "Pulse-Width-Modulation Control Circuit"
U8.1 U8.2: library part LM7805

## Free pads (board coordinates)
  round 5 hole 3.1: 0(60.96,31.52) 0(60.96,79.993) 0(60.96,128.467) 0(60.96,176.94) 0(121.74,61.62) 0(121.74,149.5) 0(152.96,27.98) 0(152.96,104.44) 0(152.96,180.9)
  round 0 hole 0.7 slot 8 at 90 deg unplated: 0(80.3,45.76) 0(104.26,163.46)

## Via types
v1: diameter 0.7, hole 0.6, Top Layer to Bottom Layer, 107 vias
v2: diameter 0.6, hole 0.5, Top Layer to Bottom Layer, 3 vias

## Nets (pads, with @x,y where several pads share a name; then routed paths per layer and width w, separated by ;. In a path a pad name is that pad's centre, name@x,y a point inside that pad or via, vN(x,y) a via of type N, cw(c..) or ccw(c..) an arc to the next point about the centre after c; other vN are vias at no path point)
5V_REF.1: C23.1.1 Q3.1.2 U7.1.2 U7.1.13 U7.1.14 U7.1.15 | length 26.6
  Top Layer w0.254: C23.1.1@100.693,177.836 100.693,177.993 101.615,178.915 104.385,178.915 105.55,177.75 106.881,179.081 109.719,179.081 110.9,177.9 110.9,175.3 U7.1.2@107.875,172.275 ; U7.1.2@106.55,172.275 U7.1.2@106.65,172.275 U7.1.2@107.875,172.275 ; U7.1.13@111.45,169.735 111.45,172.275 U7.1.2@107.875,172.275
5V_REF.2: C23.2.1 Q3.2.2 U7.2.2 U7.2.13 U7.2.14 U7.2.15 | length 31.5
  Top Layer w0.254: U7.2.13@73.068,38.073 73.068,35.533 U7.2.2@77.868,35.533 78.407,34.994 79.22,34.994 79.649,34.566 79.649,33.96 79.22,33.532 77.266,33.532 76.242,32.508 73.618,32.508 73.618,29.908 74.825,28.7 77.91,28.7 78.968,29.758 80.133,28.593 82.902,28.593 83.825,29.515 C23.2.1@83.825,29.672
+5: C17.1.2 C17.2.2 P1.1 U6.1.1 U6.2.1 | length 259.8
  Top Layer w0.5: U6.1.1@82.105,171.625 81.977,171.753 C17.1.2@81.977,175.191 82.567,174.6 P1.1@85.8,174.6 85.8,181.2 83.2,183.8 ; 83.3,183.8 56.5,183.8 53.8,181.1 53.8,27.754 57.754,23.8 94.3,23.8 102.879,32.379 ; U6.2.1@101.595,34.675 101.595,32.663 C17.2.2@102.741,31.517
+5V_ISO.1: C13.1.2 C16.1.1 C18.1.2 C22.1.1 D1.1.2 D3.1.2 D8.1.2 Q1.1.2 R1.1.2 R10.1.1 R16.1.2 U1.1.3 U3.1.1 U4.1.5 U6.1.8 U8.1.2 | length 152.9
  Top Layer w0.254: C22.1.1@69.391,156.063 70.591,154.863 C16.1.1@71.791,154.863 72.262,155.335 D3.1.2@73.8,155.335 ; R1.1.2@81.023,160.409 80.414,159.8 76.6,159.8 73.8,157 D3.1.2@73.8,155.335 ; v1(81.4,153.3) 81.4,153.6 79.19,155.81 U1.1.3@77.975,155.81 76.81,155.81 76.335,155.335 D1.1.2@75.8,155.335 D3.1.2@73.8,155.335 ; U6.1.8@82.105,166.175 84.105,166.175 85.107,167.177 C18.1.2@85.909,167.177 85.923,167.163 R10.1.1@88.091,167.163 88.527,167.6 91.6,167.6 91.95,167.25 Q1.1.2@91.95,164.45 93,165.5 94.6,165.5 95.189,164.911 95.189,159.079 v1@94.333,158.223 ; v1@85.8,148.9 D8.1.2@87.135,148.9 ; R16.1.2@90.477,151.291 90.586,151.4 91.286,150.7 v1(92.2,150.7) ; v1(92.1,152.5) 92.1,150.9 v1@92.2,150.8 ; v1(92.8,155.8) 92.991,155.991 94.131,155.991 94.88,156.74 v1@96.5,156.74 ; v1(96.5,156.68) 97.553,156.68 ; U4.1.5@96.8,155.4 98.014,155.4 C13.1.2@98.423,155.809 98.423,155.891 98.342,155.891 97.553,156.68 ; U8.1.2@97.1,163.85 97.1,164.9 97.7,165.5 102.282,165.5 102.531,165.251 102.531,158.951 104.35,157.132 104.35,156.15 107.09,153.41 114.608,153.41 114.608,122.69 114,122.082 114,119.425 U3.1.1@115.175,118.25 ; U8.1.2@97.3,163.6 97.3,156.933 97.553,156.68
  Bottom Layer w0.254: v1(81.4,153.3) 81.4,153.2 v1@85.75,148.85 ; v1@85.85,148.95 87.6,150.7 v1(92.2,150.7) ; v1(92.1,152.5) 92.1,155.1 v1(92.8,155.8) ; v1(94.214,157.933) 94.53,157.933 95.913,156.55 96.37,156.55 v1(96.5,156.68)
  other v1: 85.8,149
+5V_ISO.2: C13.2.2 C16.2.1 C18.2.2 C22.2.1 D1.2.2 D3.2.2 D8.2.2 Q1.2.2 R1.2.2 R10.2.1 R16.2.2 U1.2.3 U3.2.1 U4.2.5 U6.2.8 U8.2.2 | length 162
  Top Layer w0.254: U3.2.1@69.543,88.958 70.741,87.76 70.741,84.736 70.133,84.128 70.133,56.486 73.21,53.408 78.892,53.408 81.841,50.459 81.841,46.085 82.141,45.785 82.141,42.078 82.51,41.708 87.018,41.708 87.618,42.308 U8.2.2@87.618,43.358 ; C13.2.2@86.294,51.398 86.754,51.858 U4.2.5@88.068,51.858 88.529,51.858 89.276,51.111 ; C13.2.2@86.376,51.317 C13.2.2@86.501,51.191 ; C13.2.2@86.727,51.417 C13.2.2@86.501,51.191 ; U8.2.2@87.441,43.217 87.361,43.297 87.361,49.805 87.856,50.3 88.465,50.3 89.276,51.111 ; v1(90.5,48.9) 90.423,48.9 90.408,48.884 90.408,48.594 89.966,48.152 89.752,48.152 89.4,47.8 89.4,45.026 89.516,44.91 89.516,41.942 90.141,41.317 91.741,41.317 92.791,42.367 92.791,40.117 93.407,39.5 96.496,39.5 R10.2.1@96.65,39.654 ; v1(91.9,51.3) 91.9,51.164 91.847,51.111 89.276,51.111 ; v1@92.541,56.017 92.641,55.917 v1@92.641,54.317 ; v1(92.541,56.117) 93.455,56.117 94.155,55.417 R16.2.2@94.264,55.527 ; R10.2.1@96.627,40.045 99.169,40.045 C18.2.2@99.191,40.023 100.993,40.023 101.631,40.661 101.631,43.231 102.369,43.969 102.386,43.969 103.694,45.278 R1.2.2@103.694,46.798 ; D8.2.2@97.606,57.917 v1@99.4,57.917 ; C18.2.2@98.831,39.64 C18.2.2@99.634,39.64 ; v1(103.3,53.9) 103.3,53.258 105.551,51.007 107.931,51.007 108.724,51.8 110.941,51.8 D3.2.2@110.941,51.482 ; R1.2.2@103.718,46.408 104.71,47.4 108,47.4 110.941,50.341 D3.2.2@110.941,51.482 ; C22.2.1@115.35,50.754 114.15,51.954 112.95,51.954 112.796,51.8 111.259,51.8 D3.2.2@110.941,51.482 ; C13.2.2@86.501,51.191 86.767,51.126 86.517,50.99 86.399,50.926 86.318,50.926 86.318,51.008 C13.2.2@86.501,51.191
  Bottom Layer w0.254: v1(87.9,50.4) 88.923,50.4 89.023,50.3 89.041,50.317 90.474,48.884 90.489,48.9 v1(90.5,48.9) ; v1(91.9,51.3) 91.9,50.977 92.641,51.717 v1@92.641,54.317 ; v1(92.541,56.117) 97.717,56.117 v1@99.45,57.85 ; v1(99.4,57.9) v1@99.45,57.85 ; v1(103.3,53.9) 103.3,53.918 103.341,53.959 v1@99.45,57.85
  other v1: 92.541,54.417
+12V: Cin1.1.1 Cin1.2.1 Cin2.1.1 Cin2.2.1 P1.2 T1.1.2 T1.2.2 U7.1.12 U7.2.12 | length 296.2
  Top Layer w0.254: U7.2.12@72.968,39.343 U7.2.12@73.068,39.343 ; U7.1.12@111.45,168.465 U7.1.12@111.55,168.465
  Top Layer w0.3: U7.2.12@73.068,39.343 74.147,39.343 U7.2.12@74.218,39.343
  Top Layer w0.4: U7.2.12@74.147,39.343 75.476,40.672 75.476,43.976 76.089,44.589 T1.2.2@76.089,46.306 ; 108.946,163.629 108.992,163.583 ; U7.1.12@110.562,168.465 U7.1.12@111.45,168.465
  Top Layer w0.5: v1@67.508,34.798 v1(67.718,35.008) ; v1(68.818,37.608) 69.539,38.329 Cin1.2.1@70.44,38.329 71.453,39.343 U7.2.12@72.968,39.343 ; Cin2.2.1@71.4,47.6 71.6,47.8 74.525,47.8 74.891,47.435 ; T1.1.2@108.729,160.902 T1.1.2@108.729,160.771 ; U7.1.12@110.562,168.465 108.992,166.895 108.992,163.583 108.992,161.035 T1.1.2@108.729,160.771 ; U7.1.12@111.55,168.465 113.065,168.465 Cin1.1.1@114.078,169.478 114.978,169.478 v1(115.7,170.2) ; Cin2.1.1@113.015,160.373 112.042,159.4 110.1,159.4 T1.1.2@108.729,160.771 ; v1@116.8,172.8 v1@117.01,173.01
  Top Layer w0.54: 74.891,47.435 T1.2.2@75.989,46.336
  Top Layer w0.75: P1.2@90.8,175.2 95.437,179.837 114.963,179.837 117.01,177.79 v1@117.01,173.01
  Bottom Layer w0.5: 68.718,36.008 68.818,36.008
  Bottom Layer w0.75: 67.5,34.69 67.5,25.9 66.733,25.133 58.568,25.133 55.133,28.568 55.133,180.536 56.968,182.371 86.229,182.371 ; v1(67.718,35.008) 68.718,36.008 ; 68.818,36.008 v1(68.818,37.608) ; 86.329,182.371 86.229,182.371 ; P1.2@90.8,174.6 90.8,177.8 86.229,182.371 ; v1(115.7,170.2) 116.607,170.2 117.035,170.628 v1@117.035,172.465
  other v1: 117.1,172.8
+12V_ISO.1: C11.1.2 C12.1.1 C15.1.1 C19.1.1 C20.1.1 C21.1.1 D9.1.2 D10.1.2 R22.1.1 U5.1.1 U5.1.8 U8.1.3 | length 71.4
  Top Layer w0.254: R22.1.1@72.763,165.709 73.609,165.709 ; C20.1.1@74.437,165.891 76.485,167.939 83.821,167.939 84.747,168.866 87.19,168.866 ; 87.19,168.852 92.766,168.852 94.918,166.7 v1(96.2,166.7) ; C21.1.1@100.437,153.491 100.891,153.491 102.3,154.9 102.3,156.9 101.7,157.5 U8.1.3@101.7,163 ; v1(100.8,162.1) U8.1.3@101.7,163 ; U8.1.3@101.7,163.85 U8.1.3@101.7,163
  Top Layer w0.5: C11.1.2@100.423,147.209 100.423,146.477 101.1,145.8 104.696,145.8 D10.1.2@105.599,146.702 D9.1.2@110.679,146.702
  Top Layer w0.75: U5.1.8@98.305,146.995 98.305,151.705 98.725,152.125
  Top Layer w1: U5.1.8@98.465,146.835 98.839,147.209 C11.1.2@100.423,147.209 C15.1.1@100.423,151.391 ; 98.725,152.125 99.689,152.125 C15.1.1@100.423,151.391 ; C21.1.1@100.423,153.477 C15.1.1@100.423,151.391
  Bottom Layer w0.254: v1@96.25,166.55 100.7,162.1 v1(100.8,162.1)
+12V_ISO.2: C11.2.2 C12.2.1 C15.2.1 C19.2.1 C20.2.1 C21.2.1 D9.2.2 D10.2.2 R22.2.1 U5.2.1 U5.2.8 U8.2.3 | length 78.4
  Top Layer w0.254: U8.2.3@83,43.35 83,44.3 v1(84.1,45.4) ; v1(88.4,40.3) 90.4,38.3 102.518,38.3 103.087,38.869 105.963,38.869 106.194,39.1 108.9,39.1 110.281,40.481 C20.2.1@110.281,41.317 112.636,41.317 R22.2.1@112.654,41.298
  Top Layer w0.5: D9.2.2@74.039,60.505 D10.2.2@79.119,60.505 80.021,61.408 83.618,61.408 84.294,60.731 C11.2.2@84.294,59.998 ; v1(82.9,46.6) 82.9,43.45 U8.2.3@83,43.35
  Top Layer w0.75: C15.2.1@84.281,55.817 84.294,55.817 85.678,55.817 U5.2.1@86.413,55.083 U5.2.8@86.413,60.533 85.878,59.998
  Top Layer w1: v1(85.76,53.36) 85.403,53.717 C21.2.1@84.281,53.717 84.294,53.731 84.294,55.817 C11.2.2@84.294,59.998 85.878,59.998
  Bottom Layer w0.254: v1(84.1,45.4) 88.4,41.1 v1(88.4,40.3)
  Bottom Layer w0.5: v1(82.9,46.6) 82.9,51.8 84.92,53.82 85.38,53.36 v1(85.76,53.36)
CMD1: P3.3 R24.1.2 R37.1 | length 5
  Top Layer w0.254: P3.3@70.6,177.6 70.6,179.754 R37.1@70.837,179.991
  Top Layer w0.5: P3.3@70.6,177.6 70.709,177.491 R24.1.2@70.709,175.177
CMD2: P2.3 R24.2.2 R36.1 | length 4.7
  Top Layer w0.254: P2.3@114.031,28.227 114.163,28.095 R36.1@114.163,25.909
  Top Layer w0.5: P2.3@114.031,28.227 R24.2.2@114.031,30.54
COMMAND.1: D5.1.2 U4.1.1 U6.1.7 | length 40.2
  Top Layer w0.254: U6.1.7@80.835,166.175 80.835,167.235 81.031,167.431 84.031,167.431 84.958,168.358 86.979,168.358 ; 86.979,168.344 92.556,168.344 95.761,165.139 95.761,158.339 v1(95.8,158.3) ; v1(92.98,153.14) 92.88,153.14 92.74,153.28 92.74,154.405 D5.1.2@92.8,154.465 93.135,154.465 94.053,155.383 U4.1.1@94.55,155.383 ; v2(95.604,153.671) 95.667,153.734 95.667,154.467 95.9,154.7 97.7,154.7 v1(98.1,154.3)
  Bottom Layer w0.254: v1(92.98,153.14) 92.98,153.313 93.133,153.16 95.027,153.16 v2@95.667,153.8 ; v1(95.8,158.3) 96.3,158.3 98.1,156.5 v1(98.1,154.3)
COMMAND.2: D5.2.2 U4.2.1 U6.2.7 | length 39.7
  Top Layer w0.254: v1(86.96,53.18) 86.96,53.17 87.187,52.943 87.187,52.859 87.468,52.577 87.553,52.577 87.691,52.439 88.667,52.439 89.308,51.798 U4.2.1@90.168,51.798 ; v1(88.8,48.6) 88.892,48.508 88.892,44.815 89.008,44.699 89.008,41.65 91.85,38.808 102.308,38.808 102.9,39.4 U6.2.7@102.9,39.8 ; v1(91.4,54) 91.4,53.916 91.918,53.398 D5.2.2@91.918,52.743 ; U6.2.7@102.865,40.625 102.875,40.625 U6.2.7@102.9,40.6
  Bottom Layer w0.254: v1@86.641,53.117 v1@86.715,53.117 ; v1(86.96,53.18) 86.778,53.18 v1@86.715,53.117 ; v1@88.841,48.317 88.383,48.317 86.678,50.022 86.678,53.08 v1@86.715,53.117 ; v1(91.4,54) 91.182,54.218 88.832,54.218 87.731,53.117 v1@86.715,53.117
CT.1: C25.1.1 R30.1.2 U7.1.5 | length 7.5
  Top Layer w0.254: R30.1.2@103.233,173.716 103.233,171.63 103.816,171.047 103.816,169.784 105.135,168.465 U7.1.5@106.55,168.465
CT.2: C25.2.1 R30.2.2 U7.2.5 | length 8
  Top Layer w0.254: U7.2.5@77.868,39.343 79.657,39.343 80.702,38.298 80.702,36.461 81.285,35.878 R30.2.2@81.285,33.792
D1: C4.1.1 C26.1 C27.1 C80.2 Ca1.1 DC+++.1 Q5.2 Q6.2 R5.1.2 R6.1.2 R32.1 | length 60.3
  Top Layer w0.254: R6.1.2@70.146,123.335 C4.1.1@72.287,123.335 R5.1.2@74.428,123.335
  Top Layer w1: R6.1.2@70.146,123.335 70.3,123.181 DC+++.1@70.3,113.6 ; C27.1@132.1,165.7 132.1,167.7 ; 132.2,167.7 136.8,172.3 146.9,172.3 151.9,167.3 R32.1@151.9,151.1
  Top Layer w3.5: Q6.2@85.026,117.969 Q6.2@85.026,120.069 ; Q5.2@105.092,118.096 Q5.2@105.092,120.196
  Bottom Layer w4: Q6.2@85.026,117.969 Q6.2@85.026,118.096
D2: C4.2.1 C30.1.1 C31.1.1 Pin_A1.1 Q5.3 Q6.3 Q7.2 Q8.2 R5.2.2 R6.2.2 R41.1.2 R44.1.2 R45.1.1 | length 46.8
  Top Layer w0.254: C31.1.1@80.574,115.506 81.977,114.104 R44.1.2@81.977,113.391 90.109,113.391 90.2,113.3 ; Q6.3@90.486,118.286 Q6.3@90.486,120.069 93.317,122.9 94.4,122.9 94.841,123.341 R45.1.1@94.841,124.394 ; C30.1.1@100.063,115.709 100.5,115.273 100.5,112.6 100.2,112.3 ; C30.1.1@100.263,115.709 C30.1.1@100.423,115.709 ; R5.2.2@110.313,83.482 R6.2.2@114.595,83.482 ; Q5.3@110.552,118.452 Q5.3@110.552,120.196 ; R6.2.2@114.572,83.873 114.572,85.872 v1(115,86.2)
  Top Layer w3: Q7.2@79.7,87.2 Q7.2@79.7,89.3
  Top Layer w3.5: Q7.2@79.7,87.1 Q7.2@79.7,89.2 ; Q8.2@99.7,87.3 Q8.2@99.7,89.4
  Bottom Layer w0.254: Q8.2@99.6,89.3 Q8.2@99.7,89.4 ; v1(115,86.2) 115.6,86.8 115.6,94.2 115.5,94.3
DT_CON.1: C23.1.2 Q3.1.3 R26.1.2 U7.1.4 | length 13.7
  Top Layer w0.254: C23.1.2@103.233,177.836 R26.1.2@103.233,175.759 ; Q3.1.3@106.5,175.85 106.409,175.759 R26.1.2@103.233,175.759 ; U7.1.4@106.55,169.735 104.965,169.735 104.324,170.376 104.324,171.581 104,171.905 104,174.992 R26.1.2@103.233,175.759